# EAGLE board b (EAGLE 7.1.0)
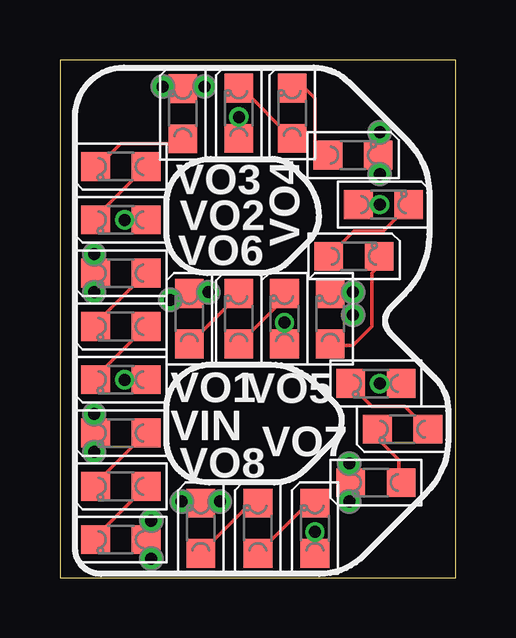
[diagram p0: board, top side]
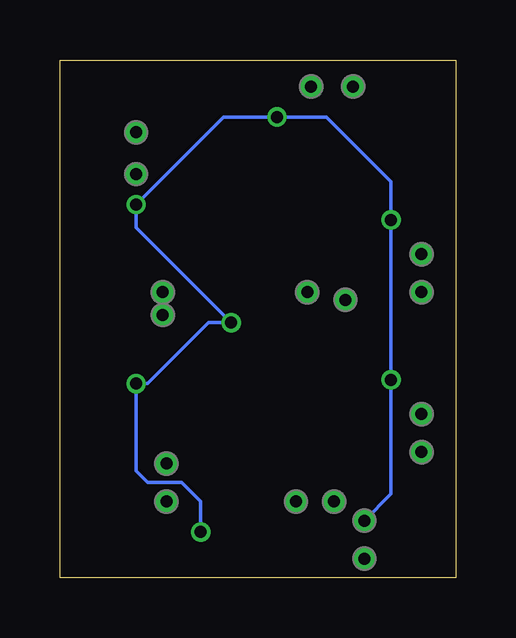
[diagram p1: board, bottom side, seen from below]

Size 16.51 x 21.59 mm. Coordinates in mm from the lower left corner, seen from the top.
Outline: 0,0 16.51,0 16.51,21.59 0,21.59 0,0
Copper layers (1*16): Top 0.035mm / dielectric 1.5mm / Bottom 0.035mm
Design rules "Fusion_eagle_rule_v1.1_tms *": minimum track width 6mil, minimum drill 12mil, track to track 6mil, track to pad 6mil, pad to pad 6mil, via to via 6mil, smd to smd 0mil, copper to edge 10mil, drill to drill 10mil, minimum pad ring 10mil, minimum via ring 6mil, stop-mask expansion 2mil, vias tented up to drill 100mil, thermal gap 10mil

## Footprints (pad centres in the part's own frame; a part is rotated, then mirrored left to right if it is on the bottom)
LED_0805 = smd 1.2 x 1.2: A 0,-1.05; C 0,1.05
P1-20 = drill 0.5: TP 0,0

## Placement (x,y rotation side)
LED1  [LED_0805]  2.54,1.59 90 top
LED2  [LED_0805]  2.54,3.81 90 top
LED3  [LED_0805]  2.54,6.03 90 top
LED4  [LED_0805]  2.54,8.26 90 top
LED5  [LED_0805]  2.54,10.48 90 top
LED6  [LED_0805]  2.54,12.7 90 top
LED7  [LED_0805]  2.54,14.92 90 top
LED8  [LED_0805]  2.54,17.14 90 top
LED9  [LED_0805]  5.13,19.35 0 top
LED10  [LED_0805]  7.46,19.37 0 top
LED11  [LED_0805]  9.68,19.37 0 top
LED12  [LED_0805]  12.22,17.62 270 top
LED13  [LED_0805]  13.49,15.56 270 top
LED14  [LED_0805]  12.26,13.4 270 top
LED15  [LED_0805]  11.27,10.79 0 top
LED16  [LED_0805]  9.37,10.79 0 top
LED17  [LED_0805]  7.46,10.79 0 top
LED18  [LED_0805]  5.4,10.79 0 top
LED19  [LED_0805]  13.18,8.1 90 top
LED20  [LED_0805]  14.29,6.19 90 top
LED21  [LED_0805]  13.18,3.97 90 top
LED22  [LED_0805]  10.64,2.06 0 top
LED23  [LED_0805]  8.26,2.06 0 top
LED24  [LED_0805]  5.87,2.06 0 top
VIN  [P1-20]  3.81,2.38 0 top
VIN1  [P1-20]  3.81,0.79 0 top
VO1  [P1-20]  1.43,6.83 0 top
VO2  [P1-20]  1.43,11.91 0 top
VO3  [P1-20]  6.03,20.48 0 top
VO4  [P1-20]  13.34,16.83 0 top
VO5  [P1-20]  12.22,10.95 0 top
VO6  [P1-20]  4.6,11.59 0 top
VO7  [P1-20]  12.06,4.76 0 top
VO8  [P1-20]  6.67,3.17 0 top
VO9  [P1-20]  1.43,5.24 0 top
VO10  [P1-20]  1.43,13.49 0 top
VO11  [P1-20]  4.29,20.48 0 top
VO12  [P1-20]  13.34,18.57 0 top
VO13  [P1-20]  12.22,11.91 0 top
VO14  [P1-20]  6.19,11.91 0 top
VO15  [P1-20]  12.06,3.17 0 top
VO16  [P1-20]  5.08,3.17 0 top

## Library data of the parts
LED1-LED24 VIN VIN1 VO1-VO16 = CyberRailGuru

## Nets
N$1: LED22.C LED23.A
N$2: LED23.C LED24.A
N$3: LED2.C LED3.A
N$4: LED1.C LED2.A
N$5: LED24.C VO8.TP VO16.TP
N$7: LED5.C LED6.A
N$8: LED4.C LED5.A
N$11: LED8.C LED9.A
N$12: LED7.C LED8.A
N$15: LED11.C LED12.A
N$16: LED10.C LED11.A
N$19: LED14.C LED15.A
N$20: LED13.C LED14.A
N$23: LED17.C LED18.A
N$24: LED16.C LED17.A
N$27: LED20.C LED21.A
N$28: LED19.C LED20.A
VIN: LED1.A LED4.A LED7.A LED10.A LED13.A LED16.A LED19.A LED22.A VIN1.TP VIN.TP
VOUT1: LED3.C VO1.TP VO9.TP
VOUT2: LED6.C VO2.TP VO10.TP
VOUT3: LED9.C VO3.TP VO11.TP
VOUT4: LED12.C VO4.TP VO12.TP
VOUT5: LED15.C VO5.TP VO13.TP
VOUT6: LED18.C VO6.TP VO14.TP
VOUT7: LED21.C VO7.TP VO15.TP

## Tracks (layer width: path | path; a pad name or v marks a point on that pad's centre or on a via)
N$1
  Top 0.152: LED22.C 10.36,3.11 LED23.A
N$2
  Top 0.152: LED23.C 7.97,3.11 LED24.A
N$3
  Top 0.152: LED2.C 1.49,3.93 LED3.A
N$4
  Top 0.152: LED1.C 1.49,1.71 LED2.A
N$5
  Top 0.152: VO16.TP 5.81,3.17 LED24.C 5.93,3.17 VO8.TP
N$7
  Top 0.152: LED5.C 1.49,10.6 LED6.A
N$8
  Top 0.152: LED4.C 1.49,8.38 LED5.A
N$11
  Top 0.152: LED8.C 1.59,17.14 2.54,18.1 4.93,18.1 LED9.A
N$12
  Top 0.152: LED7.C 1.49,15.04 LED8.A
N$15
  Top 0.152: LED11.C 10.22,20.42 10.64,20 10.64,18.16 LED12.A
N$16
  Top 0.152: LED10.C 7.58,20.42 LED11.A
N$19
  Top 0.152: LED14.C 13.31,12.99 13.02,12.7 13.02,10.48 12.22,9.68 11.33,9.68 LED15.A
N$20
  Top 0.152: LED13.C 14.54,15.5 13.49,14.45 12.26,14.45 LED14.A
N$23
  Top 0.152: LED17.C 7.46,11.81 LED18.A
N$24
  Top 0.152: LED16.C 9.37,11.65 LED17.A
N$27
  Top 0.152: LED20.C 13.24,5.81 14.13,4.92 14.13,4.07 LED21.A
N$28
  Top 0.152: LED19.C 12.13,8.04 13.02,7.14 14.38,7.14 LED20.A
VIN  (via drill 0.5)
  Top 0.152: VIN1.TP 3.81,1.37 LED1.A 3.81,1.81 VIN.TP | v2.7,8.26 LED4.A | LED7.A v2.7,14.92 | LED10.A v7.46,19.21 | LED13.A v13.34,15.56 | LED16.A v9.37,10.64 | LED19.A v13.34,8.1 | LED22.A v10.64,1.91
  Bottom 0.152: VIN.TP 2.7,3.49 v2.7,8.26 v2.7,14.92 2.7,16.51 5.4,19.21 v7.46,19.21 9.68,19.21 v13.34,15.56 13.34,14.61 v9.37,10.64 10.32,10.64 12.86,8.1 v13.34,8.1 13.34,4.45 12.86,3.97 11.43,3.97 10.64,3.17 v10.64,1.91
VOUT1
  Top 0.152: VO1.TP 1.43,6.09 LED3.C 1.43,5.97 VO9.TP
VOUT2
  Top 0.152: VO2.TP 1.43,12.64 LED6.C 1.43,12.76 VO10.TP
VOUT3
  Top 0.152: VO11.TP 5.05,20.48 LED9.C 5.21,20.48 VO3.TP
VOUT4
  Top 0.152: VO12.TP 13.34,17.68 LED12.C 13.34,17.56 VO4.TP
VOUT5
  Top 0.152: LED15.C 11.33,11.91 VO13.TP VO5.TP
VOUT6
  Top 0.152: VO14.TP 5.46,11.91 LED18.C 5.14,11.59 VO6.TP
VOUT7
  Top 0.152: VO15.TP 12.06,3.91 LED21.C 12.06,4.03 VO7.TP

## Text on the board
201bmp: B